# EAGLE board CT_schematic (EAGLE 7.6.0)

Size 100 x 80 mm. Coordinates in mm from the lower left corner, seen from the top.
Outline: 0,0 100,0 100,80 0,80 0,0
Copper layers (1*16): Top 0.035mm / dielectric 1.5mm / Bottom 0.035mm
Design rules "default": minimum track width 10mil, minimum drill 24mil, track to track 8mil, track to pad 8mil, pad to pad 8mil, via to via 8mil, smd to smd 8mil, copper to edge 40mil, drill to drill 8mil, minimum pad ring 10mil, minimum via ring 8mil, stop-mask expansion 4mil, vias tented up to drill 0mil, thermal gap 10mil

## Footprints (pad centres in the part's own frame; a part is rotated, then mirrored left to right if it is on the bottom)
C0402 = smd 0.5 x 0.5: 1 -0.508,0; 2 0.508,0
C0603 = smd 0.8 x 0.8: 1 -0.762,0; 2 0.762,0
C0805 = smd 1.2 x 1.3: 1 -1.016,0; 2 1.016,0
C1210 = smd 1.2 x 2.5: 1 -1.524,0; 2 1.524,0
EXV-9B = smd 2.718 x 1.778: 1 -2.108,0; 2 2.108,0
R0603 = smd 0.8 x 0.8: 1 -0.762,0; 2 0.762,0
EXV-9H = smd 3.505 x 1.676: 1 -2.857,0; 2 2.857,0
L0603 = smd 0.8 x 0.8: 1 -0.762,0; 2 0.762,0
PJ-037B_PACKAGE = drill 3.7 square: 1 12,0 | drill 3.2 square: 2 6,0
UFBGA176 = smd 0.3 x 0.3: A1 0,0; A2 0.65,0; A3 1.3,0; A4 1.95,0; A5 2.6,0; A6 3.25,0; A7 3.9,0; A8 4.55,0; A9 5.2,0; A10 5.85,0; A11 6.5,0; A12 7.15,0; A13 7.8,0; A14 8.45,0; A15 9.1,0; B1 0,-0.65; B2 0.65,-0.65; B3 1.3,-0.65; B4 1.95,-0.65; B5 2.6,-0.65; B6 3.25,-0.65; B7 3.9,-0.65; B8 4.55,-0.65; B9 5.2,-0.65; B10 5.85,-0.65; B11 6.5,-0.65; B12 7.15,-0.65; B13 7.8,-0.65; B14 8.45,-0.65; B15 9.1,-0.65; C1 0,-1.3; C2 0.65,-1.3; C3 1.3,-1.3; C4 1.95,-1.3; C5 2.6,-1.3; C6 3.25,-1.3; C7 3.9,-1.3; C8 4.55,-1.3; C9 5.2,-1.3; C10 5.85,-1.3; C11 6.5,-1.3; C12 7.15,-1.3; C13 7.8,-1.3; C14 8.45,-1.3; C15 9.1,-1.3; D1 0,-1.95; D2 0.65,-1.95; D3 1.3,-1.95; D4 1.95,-1.95; D5 2.6,-1.95; D6 3.25,-1.95; D7 3.9,-1.95; D8 4.55,-1.95; D9 5.2,-1.95; D10 5.85,-1.95; D11 6.5,-1.95; D12 7.15,-1.95; D13 7.8,-1.95; D14 8.45,-1.95; D15 9.1,-1.95; E1 0,-2.6; E2 0.65,-2.6; E3 1.3,-2.6; E4 1.95,-2.6; E12 7.15,-2.6; E13 7.8,-2.6; E14 8.45,-2.6; E15 9.1,-2.6; F1 0,-3.25; F2 0.65,-3.25; F3 1.3,-3.25; F4 1.95,-3.25; F6 3.25,-3.25; F7 3.9,-3.25; F8 4.55,-3.25; F9 5.2,-3.25; F10 5.85,-3.25; F12 7.15,-3.25; F13 7.8,-3.25; F14 8.45,-3.25; F15 9.1,-3.25; G1 0,-3.9; G2 0.65,-3.9; G3 1.3,-3.9; G4 1.95,-3.9; G6 3.25,-3.9; G7 3.9,-3.9; G8 4.55,-3.9; G9 5.2,-3.9; G10 5.85,-3.9; G12 7.15,-3.9; G13 7.8,-3.9; G14 8.45,-3.9; G15 9.1,-3.9; H1 0,-4.55; H2 0.65,-4.55; H3 1.3,-4.55; H4 1.95,-4.55; H6 3.25,-4.55; H7 3.9,-4.55; H8 4.55,-4.55; H9 5.2,-4.55; H10 5.85,-4.55; H12 7.15,-4.55; H13 7.8,-4.55; H14 8.45,-4.55; H15 9.1,-4.55; J1 0,-5.2; J2 0.65,-5.2; J3 1.3,-5.2; J4 1.95,-5.2; J6 3.25,-5.2; J7 3.9,-5.2; J8 4.55,-5.2; J9 5.2,-5.2; J10 5.85,-5.2; J12 7.15,-5.2; J13 7.8,-5.2; J14 8.45,-5.2; J15 9.1,-5.2; K1 0,-5.85; K2 0.65,-5.85; K3 1.3,-5.85; K4 1.95,-5.85; K6 3.25,-5.85; K7 3.9,-5.85; K8 4.55,-5.85; K9 5.2,-5.85; K10 5.85,-5.85; K12 7.15,-5.85; K13 7.8,-5.85; K14 8.45,-5.85; K15 9.1,-5.85; L1 0,-6.5; L2 0.65,-6.5; L3 1.3,-6.5; L4 1.95,-6.5; L12 7.15,-6.5; L13 7.8,-6.5; L14 8.45,-6.5; L15 9.1,-6.5; M1 0,-7.15; M2 0.65,-7.15; M3 1.3,-7.15; M4 1.95,-7.15; M5 2.6,-7.15; M6 3.25,-7.15; M7 3.9,-7.15; M8 4.55,-7.15; M9 5.2,-7.15; M10 5.85,-7.15; M11 6.5,-7.15; M12 7.15,-7.15; M13 7.8,-7.15; M14 8.45,-7.15; M15 9.1,-7.15; N1 0,-7.8; N2 0.65,-7.8; N3 1.3,-7.8; N4 1.95,-7.8; N5 2.6,-7.8; N6 3.25,-7.8; N7 3.9,-7.8; N8 4.55,-7.8; N9 5.2,-7.8; N10 5.85,-7.8; N11 6.5,-7.8; N12 7.15,-7.8; N13 7.8,-7.8; N14 8.45,-7.8; N15 9.1,-7.8; P1 0,-8.45; P2 0.65,-8.45; P3 1.3,-8.45; P4 1.95,-8.45; P5 2.6,-8.45; P6 3.25,-8.45; P7 3.9,-8.45; P8 4.55,-8.45; P9 5.2,-8.45; P10 5.85,-8.45; P11 6.5,-8.45; P12 7.15,-8.45; P13 7.8,-8.45; P14 8.45,-8.45; P15 9.1,-8.45; R1 0,-9.1; R2 0.65,-9.1; R3 1.3,-9.1; R4 1.95,-9.1; R5 2.6,-9.1; R6 3.25,-9.1; R7 3.9,-9.1; R8 4.55,-9.1; R9 5.2,-9.1; R10 5.85,-9.1; R11 6.5,-9.1; R12 7.15,-9.1; R13 7.8,-9.1; R14 8.45,-9.1; R15 9.1,-9.1
QFN-32 = smd 0.6 x 0.3: 1 -2.3,1.75; 2 -2.3,1.25; 3 -2.3,0.75; 4 -2.3,0.25; 5 -2.3,-0.25; 6 -2.3,-0.75; 7 -2.3,-1.25; 8 -2.3,-1.75; 17 2.3,-1.75; 18 2.3,-1.25; 19 2.3,-0.75; 20 2.3,-0.25; 21 2.3,0.25; 22 2.3,0.75; 23 2.3,1.25; 24 2.3,1.75 | smd 0.3 x 0.6: 9 -1.75,-2.3; 10 -1.25,-2.3; 11 -0.75,-2.3; 12 -0.25,-2.3; 13 0.25,-2.3; 14 0.75,-2.3; 15 1.25,-2.3; 16 1.75,-2.3; 25 1.75,2.3; 26 1.25,2.3; 27 0.75,2.3; 28 0.25,2.3; 29 -0.25,2.3; 30 -0.75,2.3; 31 -1.25,2.3; 32 -1.75,2.3 | smd 3.2 x 3.2: EXP 0,0
7498011122R = smd 0.71 x 2.29: 1 -3.545,-3.18; 2 -2.525,-3.18; 3 -1.505,-3.18; 4 -0.485,-3.18; 5 0.535,-3.18; 6 1.555,-3.18; 8 3.595,-3.18; 9 5.635,-3.18; 10 6.655,-3.18; 11 -6.605,-3.18; 12 -5.585,-3.18 | smd 1.4 x 2.54: 13 -8.51,10.2; 14 8.51,10.2 | hole 1.4: -3.5,0; 3.5,0
VFBGA-63 = smd 0.4 x 0.4: A1 -3.6,4.4; A2 -2.8,4.4; A9 2.8,4.4; A10 3.6,4.4; B1 -3.6,3.6; B9 2.8,3.6; B10 3.6,3.6; C3 -2,2.8; C4 -1.2,2.8; C5 -0.4,2.8; C6 0.4,2.8; C7 1.2,2.8; C8 2,2.8; D3 -2,2; D4 -1.2,2; D5 -0.4,2; D6 0.4,2; D7 1.2,2; D8 2,2; E3 -2,1.2; E4 -1.2,1.2; E5 -0.4,1.2; E6 0.4,1.2; E7 1.2,1.2; E8 2,1.2; F3 -2,0.4; F4 -1.2,0.4; F5 -0.4,0.4; F6 0.4,0.4; F7 1.2,0.4; F8 2,0.4; G3 -2,-0.4; G4 -1.2,-0.4; G5 -0.4,-0.4; G6 0.4,-0.4; G7 1.2,-0.4; G8 2,-0.4; H3 -2,-1.2; H4 -1.2,-1.2; H5 -0.4,-1.2; H6 0.4,-1.2; H7 1.2,-1.2; H8 2,-1.2; J3 -2,-2; J4 -1.2,-2; J5 -0.4,-2; J6 0.4,-2; J7 1.2,-2; J8 2,-2; K3 -2,-2.8; K4 -1.2,-2.8; K5 -0.4,-2.8; K6 0.4,-2.8; K7 1.2,-2.8; K8 2,-2.8; L1 -3.6,-3.6; L2 -2.8,-3.6; L9 2.8,-3.6; L10 3.6,-3.6; M1 -3.6,-4.4; M2 -2.8,-4.4; M9 2.8,-4.4; M10 3.6,-4.4
RHB32_3P45X3P45 = smd 0.85 x 0.28: 1 -2.475,1.75; 2 -2.475,1.25; 3 -2.475,0.75; 4 -2.475,0.25; 5 -2.475,-0.25; 6 -2.475,-0.75; 7 -2.475,-1.25; 8 -2.475,-1.75; 17 2.475,-1.75; 18 2.475,-1.25; 19 2.475,-0.75; 20 2.475,-0.25; 21 2.475,0.25; 22 2.475,0.75; 23 2.475,1.25; 24 2.475,1.75 | smd 0.28 x 0.85: 9 -1.75,-2.475; 10 -1.25,-2.475; 11 -0.75,-2.475; 12 -0.25,-2.475; 13 0.25,-2.475; 14 0.75,-2.475; 15 1.25,-2.475; 16 1.75,-2.475; 25 1.75,2.475; 26 1.25,2.475; 27 0.75,2.475; 28 0.25,2.475; 29 -0.25,2.475; 30 -0.75,2.475; 31 -1.25,2.475; 32 -1.75,2.475 | smd 3.45 x 3.45: 33 0,0
MICRO_USB_AB = smd 0.4 x 1.35: 1 1.3,0.26; 2 0.65,0.26; 3 0,0.26; 4 -0.65,0.26; 5 -1.3,0.26 | drill 0.6 pad 0.95 long: 6 4.175,-2.54; 7 -4.175,-2.54 | drill 0.7 pad 1.1 long: 8 -2.225,0.46; 9 2.225,0.46
SOT143B = smd 1 x 0.7: 1 -0.75,-1 | smd 0.6 x 0.7: 2 0.95,-1; 3 0.95,1; 4 -0.95,1
SOT-23-6 = smd 1.1 x 0.6: 1 -1.4,0.95; 2 -1.4,0; 3 -1.4,-0.95; 4 1.4,-0.95; 5 1.4,0; 6 1.4,0.95
ABLS-25.000MHZ-B2F-T = smd 5.6 x 2.8: 1 -3.81,0; 2 5.69,0
ASEK = smd 1.4 x 1: 1 -1.1,-0.8; 2 1.1,-0.8; 3 1.1,0.8; 4 -1.1,0.8
ASFL1 = smd 1.7 x 1.5: 1 -1.27,-1.1; 2 1.27,-1.1; 3 1.27,1.1; 4 -1.27,1.1
WSON-8 = smd 0.3 x 0.6: 1 -0.75,0; 2 0.05,0; 3 0.85,0; 4 1.65,0; 5 1.65,3.8; 6 0.85,3.8; 7 0.05,3.8; 8 -0.75,3.8 | smd 3 x 2.6: PAD 0.45,1.9
LP2954 = smd 1.6 x 0.6: 1 -2.475,1.905 | smd 1.55 x 0.6: 2 -2.475,0.635; 3 -2.475,-0.635; 4 -2.475,-1.905; 5 2.475,-1.905; 6 2.475,-0.635; 7 2.475,0.635; 8 2.475,1.905
QFN-38_UHF = smd 0.75 x 0.3: 1 -2.4,2.75; 2 -2.4,2.25; 3 -2.4,1.75; 4 -2.4,1.25; 6 -2.4,0.25; 7 -2.4,-0.25; 8 -2.4,-0.75; 9 -2.4,-1.25; 10 -2.4,-1.75; 11 -2.4,-2.25; 12 -2.4,-2.75; 20 2.4,-2.75; 21 2.4,-2.25; 22 2.4,-1.75; 23 2.4,-1.25; 24 2.4,-0.75; 25 2.4,-0.25; 26 2.4,0.25; 27 2.4,0.75; 28 2.4,1.25; 29 2.4,1.75; 30 2.4,2.25; 31 2.4,2.75 | smd 0.758 x 0.3: 5 -2.4,0.75 | smd 0.3 x 0.75: 13 -1.5,-3.4; 14 -1,-3.4; 15 -0.5,-3.4; 16 0,-3.4; 17 0.5,-3.4; 18 1,-3.4; 19 1.5,-3.4; 32 1.5,3.4; 33 1,3.4; 34 0.5,3.4; 35 0,3.4; 36 -0.5,3.4; 37 -1,3.4; 38 -1.5,3.4 | smd 3.2 x 5.2: 39 0,0
IRF8306MTRPBF = smd 0.9 x 1.85: 1 0,0; 2 0,-2.35; 6 6.4,0; 7 6.4,-2.35 | smd 0.75 x 0.75: 3 1.75,-1.175 | smd 1.45 x 0.87: 4 3.5,-0.565; 5 3.5,-1.785
SW_4-1437565-2 = smd 1.4 x 2.1: 1 -2.23,4.55; 2 -2.23,-4.55; 3 2.23,4.55; 4 2.23,-4.55
LGM67K-G1J2-24-Z = smd 0.8 x 1.4: A -2,0; C 0,0
NC7SZ125M5X = smd 1.3 x 0.7: 1 -1.3,0.95; 2 -1.3,0; 3 -1.3,-0.95; 4 1.3,-0.95; 5 1.3,0.95

## Placement (x,y rotation side)
C1  1e-07  [C0402]  -39.37,96.52 0 top  (outside the outline)
C2  1e-06  [C0603]  -63.5,86.36 0 top  (outside the outline)
C3  1e-07  [C0402]  -43.18,96.52 0 top  (outside the outline)
C4  1e-07  [C0402]  -46.99,96.52 0 top  (outside the outline)
C5  1e-07  [C0402]  -50.8,96.52 0 top  (outside the outline)
C6  1e-07  [C0402]  -54.61,96.52 0 top  (outside the outline)
C7  1e-07  [C0402]  -58.42,96.52 0 top  (outside the outline)
C8  1e-07  [C0402]  -62.23,96.52 0 top  (outside the outline)
C9  1e-07  [C0402]  -66.04,96.52 0 top  (outside the outline)
C10  1e-07  [C0402]  -69.85,96.52 0 top  (outside the outline)
C11  1e-07  [C0402]  -73.66,96.52 0 top  (outside the outline)
C12  1e-07  [C0402]  -77.47,96.52 0 top  (outside the outline)
C13  1e-07  [C0402]  -81.28,96.52 0 top  (outside the outline)
C14  1e-07  [C0402]  -85.09,96.52 0 top  (outside the outline)
C15  1e-07  [C0402]  -88.9,96.52 0 top  (outside the outline)
C16  1e-07  [C0402]  -92.71,96.52 0 top  (outside the outline)
C17  1e-07  [C0402]  -15.24,101.6 0 top  (outside the outline)
C18  1e-07  [C0402]  -19.05,101.6 0 top  (outside the outline)
C19  1e-07  [C0402]  -22.86,101.6 0 top  (outside the outline)
C20  4.7e-06  [C0805]  -82.55,69.85 0 top  (outside the outline)
C21  1e-07  [C0402]  -26.67,101.6 0 top  (outside the outline)
C22  1e-07  [C0402]  -30.48,101.6 0 top  (outside the outline)
C23  1e-08  [C0603]  -67.31,86.36 0 top  (outside the outline)
C24  1e-06  [C0603]  -71.12,86.36 0 top  (outside the outline)
C25  1e-11  [C0402]  -34.29,101.6 0 top  (outside the outline)
C26  1e-11  [C0402]  -38.1,101.6 0 top  (outside the outline)
C27  1e-07  [C0402]  -41.91,101.6 0 top  (outside the outline)
C28  1e-07  [C0402]  -45.72,101.6 0 top  (outside the outline)
C29  1e-07  [C0402]  -49.53,101.6 0 top  (outside the outline)
C30  1e-07  [C0402]  -53.34,101.6 0 top  (outside the outline)
C31  2.2e-06  [C0603]  -44.45,86.36 0 top  (outside the outline)
C32  1e-07  [C0402]  -57.15,101.6 0 top  (outside the outline)
C33  1e-07  [C0402]  -60.96,101.6 0 top  (outside the outline)
C34  1e-05  [C0805]  -87.63,69.85 0 top  (outside the outline)
C35  1e-07  [C0402]  -64.77,101.6 0 top  (outside the outline)
C36  2.2e-11  [C0402]  -31.75,96.52 0 top  (outside the outline)
C37  2.2e-11  [C0402]  -35.56,96.52 0 top  (outside the outline)
C38  1e-07  [C0402]  -68.58,101.6 0 top  (outside the outline)
C39  1e-07  [C0402]  -72.39,101.6 0 top  (outside the outline)
C40  1e-07  [C0402]  -76.2,101.6 0 top  (outside the outline)
C41  1e-07  [C0402]  -80.01,101.6 0 top  (outside the outline)
C42  2.2e-06  [C0603]  -48.26,86.36 0 top  (outside the outline)
C43  1e-07  [C0402]  -83.82,101.6 0 top  (outside the outline)
C44  2.2e-06  [C0603]  -52.07,86.36 0 top  (outside the outline)
C45  1e-07  [C0402]  -87.63,101.6 0 top  (outside the outline)
C46  1e-07  [C0402]  -91.44,101.6 0 top  (outside the outline)
C47  2.2e-06  [C0603]  -55.88,86.36 0 top  (outside the outline)
C48  1e-06  [C0603]  -74.93,86.36 0 top  (outside the outline)
C49  1e-08  [C0402]  -15.24,106.68 0 top  (outside the outline)
C50  1e-08  [C0402]  -19.05,106.68 0 top  (outside the outline)
C51  1e-08  [C0402]  -22.86,106.68 0 top  (outside the outline)
C52  1e-05  [C1210]  -78.74,62.23 0 top  (outside the outline)
C53  1e-05  [C0805]  -92.71,69.85 0 top  (outside the outline)
C54  1e-06  [EXV-9B]  -24.13,69.85 0 top  (outside the outline)
C55  2.2e-06  [EXV-9B]  -33.02,69.85 0 top  (outside the outline)
C56  1e-06  [EXV-9B]  -41.91,69.85 0 top  (outside the outline)
C57  2.2e-06  [EXV-9B]  -50.8,69.85 0 top  (outside the outline)
C58  1e-08  [C0402]  -26.67,106.68 0 top  (outside the outline)
C59  1e-05  [C1210]  -85.09,62.23 0 top  (outside the outline)
C60  1e-05  [C1210]  -91.44,62.23 0 top  (outside the outline)
C61  1e-08  [C0402]  -30.48,106.68 0 top  (outside the outline)
C62  1e-05  [C1210]  -16.51,69.85 0 top  (outside the outline)
C63  1e-05  [C0805]  -15.24,76.2 0 top  (outside the outline)
C64  1e-07  [C0402]  -34.29,106.68 0 top  (outside the outline)
C65  2.2e-06  [C0603]  -59.69,86.36 0 top  (outside the outline)
C66  2.45e-08  [R0603]  -15.24,81.28 0 top  (outside the outline)
C67  2.8258362168397e-09  [R0603]  -25.4,76.2 0 top  (outside the outline)
C68  7.105e-09  [R0603]  -43.18,76.2 0 top  (outside the outline)
C69  0.0001  [EXV-9H]  -66.04,53.34 0 top  (outside the outline)
C70  0.0001  [EXV-9H]  -77.47,53.34 0 top  (outside the outline)
C71  1e-08  [C0402]  -38.1,106.68 0 top  (outside the outline)
C72  1e-08  [C0402]  -41.91,106.68 0 top  (outside the outline)
C73  1e-08  [C0402]  -45.72,106.68 0 top  (outside the outline)
F1  600.0  [L0603]  -78.74,86.36 0 top  (outside the outline)
I1  97.0  [R0603]  -82.55,86.36 0 top  (outside the outline)
J1  PJ-037B  [PJ-037B_PACKAGE]  -46.99,7.62 0 top  (outside the outline)
R2  1000.0  [R0603]  -86.36,86.36 0 top  (outside the outline)
R7  4700.0  [R0603]  -90.17,86.36 0 top  (outside the outline)
R8  4700.0  [R0603]  -15.24,91.44 0 top  (outside the outline)
R9  4700.0  [R0603]  -19.05,91.44 0 top  (outside the outline)
R10  2200.0  [R0603]  -22.86,91.44 0 top  (outside the outline)
R12  2200.0  [R0603]  -26.67,91.44 0 top  (outside the outline)
R14  10000.0  [R0603]  -20.32,81.28 0 top  (outside the outline)
R15  10000.0  [R0603]  -25.4,81.28 0 top  (outside the outline)
R16  10000.0  [R0603]  -30.48,81.28 0 top  (outside the outline)
R17  0.1  [R0603]  -30.48,91.44 0 top  (outside the outline)
R18  0.1  [R0603]  -34.29,91.44 0 top  (outside the outline)
R19  200.0  [R0603]  -38.1,91.44 0 top  (outside the outline)
R20  220.0  [R0603]  -41.91,91.44 0 top  (outside the outline)
R21  6490.0  [R0603]  -45.72,91.44 0 top  (outside the outline)
R22  4700.0  [R0603]  -49.53,91.44 0 top  (outside the outline)
R23  4700.0  [R0603]  -53.34,91.44 0 top  (outside the outline)
R24  1000.0  [R0603]  -57.15,91.44 0 top  (outside the outline)
R25  1000.0  [R0603]  -60.96,91.44 0 top  (outside the outline)
R26  1000.0  [R0603]  -64.77,91.44 0 top  (outside the outline)
R27  4700.0  [R0603]  -68.58,91.44 0 top  (outside the outline)
R28  1000.0  [R0603]  -72.39,91.44 0 top  (outside the outline)
R29  1000.0  [R0603]  -76.2,91.44 0 top  (outside the outline)
R30  1000.0  [R0603]  -80.01,91.44 0 top  (outside the outline)
R31  4700.0  [R0603]  -83.82,91.44 0 top  (outside the outline)
R32  10000.0  [R0603]  -35.56,81.28 0 top  (outside the outline)
R33  10000.0  [R0603]  -40.64,81.28 0 top  (outside the outline)
R34  10000.0  [R0603]  -45.72,81.28 0 top  (outside the outline)
R35  10000.0  [R0603]  -50.8,81.28 0 top  (outside the outline)
R36  10000.0  [R0603]  -55.88,81.28 0 top  (outside the outline)
R37  47000.0  [R0603]  -60.96,81.28 0 top  (outside the outline)
R38  10000.0  [R0603]  -66.04,81.28 0 top  (outside the outline)
R39  10000.0  [R0603]  -71.12,81.28 0 top  (outside the outline)
R40  100000.0  [R0603]  -48.26,76.2 0 top  (outside the outline)
R41  200.0  [R0603]  -87.63,91.44 0 top  (outside the outline)
R42  1000.0  [R0603]  -91.44,91.44 0 top  (outside the outline)
R43  100000.0  [R0603]  -53.34,76.2 0 top  (outside the outline)
R44  100000.0  [R0603]  -58.42,76.2 0 top  (outside the outline)
R45  47000.0  [R0603]  -76.2,81.28 0 top  (outside the outline)
R46  100000.0  [R0603]  -63.5,76.2 0 top  (outside the outline)
R47  100000.0  [R0603]  -68.58,76.2 0 top  (outside the outline)
R48  100000.0  [R0603]  -73.66,76.2 0 top  (outside the outline)
R49  164658.62  [R0603]  -38.1,76.2 0 top  (outside the outline)
R50  100000.0  [R0603]  -78.74,76.2 0 top  (outside the outline)
R51  100000.0  [R0603]  -83.82,76.2 0 top  (outside the outline)
R52  3900.0  [R0603]  -15.24,96.52 0 top  (outside the outline)
R53  1000.0  [R0603]  -19.05,96.52 0 top  (outside the outline)
R54  100000.0  [R0603]  -88.9,76.2 0 top  (outside the outline)
R55  200.0  [R0603]  -22.86,96.52 0 top  (outside the outline)
R56  1000.0  [R0603]  -26.67,96.52 0 top  (outside the outline)
R57  10000.0  [R0603]  -81.28,81.28 0 top  (outside the outline)
R58  75000.0  [R0603]  -86.36,81.28 0 top  (outside the outline)
R59  10000.0  [R0603]  -91.44,81.28 0 top  (outside the outline)
R60  10000.0  [R0603]  -15.24,86.36 0 top  (outside the outline)
R61  95300.0  [R0603]  -20.32,86.36 0 top  (outside the outline)
R62  95300.0  [R0603]  -25.4,86.36 0 top  (outside the outline)
R63  10000.0  [R0603]  -30.48,86.36 0 top  (outside the outline)
R64  10000.0  [R0603]  -35.56,86.36 0 top  (outside the outline)
R65  10000.0  [R0603]  -40.64,86.36 0 top  (outside the outline)
R66  130963.63636364  [R0603]  -33.02,76.2 0 top  (outside the outline)
U1  STM32F407IGH6  [UFBGA176]  -22.86,38.1 0 top  (outside the outline)
U2  KSZ8081RNBIA-TR  [QFN-32]  -36.83,34.29 0 top  (outside the outline)
U3  7498011122R  [7498011122R]  -22.86,7.62 0 top  (outside the outline)
U4  mt29f4g08abbdah4  [VFBGA-63]  -53.34,6.35 0 top  (outside the outline)
U5  TUSB1210BRHBR  [RHB32_3P45X3P45]  -58.42,63.5 0 top  (outside the outline)
U6  47590-0001  [MICRO_USB_AB]  -66.04,7.62 0 top  (outside the outline)
U7  prtr5v0u2ax  [SOT143B]  -58.42,106.68 0 top  (outside the outline)
U8  MAX4995AAUT+T  [SOT-23-6]  -58.42,68.58 0 top  (outside the outline)
U9  ABLS-25.000MHZ-B2F-T  [ABLS-25.000MHZ-B2F-T]  -26.67,63.5 0 top  (outside the outline)
U10  ABLS-25.000MHZ-B2F-T  [ABLS-25.000MHZ-B2F-T]  -46.99,63.5 0 top  (outside the outline)
U11  ASEK-32.768KHz-ECST  [ASEK]  -57.15,53.34 0 top  (outside the outline)
U12  ASFL1-19.2MHZ-NCS  [ASFL1]  -27.94,54.61 0 top  (outside the outline)
U13  LP3878SDX-ADJ/NOPB  [WSON-8]  -45.72,43.18 0 top  (outside the outline)
U14  LP2954AIMX/NOPB  [LP2954]  -54.61,33.02 0 top  (outside the outline)
U15  LP2954AIMX/NOPB  [LP2954]  -71.12,33.02 0 top  (outside the outline)
U16  LP3878SDX-ADJ/NOPB  [WSON-8]  -66.04,43.18 0 top  (outside the outline)
U17  LP3878SDX-ADJ/NOPB  [WSON-8]  -86.36,43.18 0 top  (outside the outline)
U18  LTC2928CUHF#PBF  [QFN-38_UHF]  -35.56,53.34 0 top  (outside the outline)
U19  IRF8306MTRPbF  [IRF8306MTRPBF]  -88.9,34.29 0 top  (outside the outline)
U20  IRF8306MTRPbF  [IRF8306MTRPBF]  -26.67,45.72 0 top  (outside the outline)
U21  4-1437565-2  [SW_4-1437565-2]  -86.36,6.35 0 top  (outside the outline)
U22  Q65110A2395  [LGM67K-G1J2-24-Z]  -67.31,62.23 0 top  (outside the outline)
U23  nc7sz125m5x  [NC7SZ125M5X]  -63.5,69.85 0 top  (outside the outline)
U24  nc7sz125m5x  [NC7SZ125M5X]  -69.85,69.85 0 top  (outside the outline)
U25  nc7sz125m5x  [NC7SZ125M5X]  -76.2,69.85 0 top  (outside the outline)

## Library data of the parts
C1-C73 F1 I1 J1 R2 R7-R10 R12 R14-R66 U1-U25 = circuit_tree

## Nets
CLK_CRYSTAL_U1_G1: C25.1 U1.G1 U9.1
CLK_CRYSTAL_U1_H1: C26.1 U1.H1 U9.2
CLK_CRYSTAL_U2_8: C36.1 U2.8 U10.2
CLK_CRYSTAL_U2_9: C37.1 U2.9 U10.1
CLK_U1_E1: U1.E1 U11.3
CLK_U5_1: U5.1 U12.3
GND: C1.2 C2.2 C3.2 C4.2 C5.2 C6.2 C7.2 C8.2 C9.2 C10.2 C11.2 C12.2 C13.2 C14.2 C15.2 C16.2 C17.2 C18.2 C19.2 C20.2 C21.2 C22.2 C23.2 C24.2 C25.2 C26.2 C27.2 C28.2 C29.2 C30.2 C31.2 C32.2 C33.2 C34.2 C35.2 C36.2 C37.2 C38.2 C39.2 C40.2 C41.2 C42.2 C43.2 C44.2 C45.2 C46.2 C47.2 C48.2 C49.2 C50.2 C51.2 C52.2 C53.2 C54.2 C55.2 C56.2 C57.2 C58.2 C59.2 C60.2 C61.2 C62.2 C63.2 C64.2 C65.2 C66.2 C67.2 C68.2 C69.2 C70.2 C71.2 C72.2 C73.2 J1.2 R2.2 R15.2 R17.2 R18.2 R21.2 R23.2 R24.2 R25.2 R26.2 R28.2 R29.2 R30.2 R37.2 R39.2 R42.2 R46.2 R50.2 R53.2 R56.2 R58.2 R61.2 R62.2 R63.2 R64.2 R65.2 U1.D5 U1.D7 U1.D8 U1.D9 U1.F2 U1.F6 U1.F7 U1.F8 U1.F9 U1.F10 U1.F12 U1.G2 U1.G6 U1.G7 U1.G8 U1.G9 U1.G10 U1.G12 U1.H6 U1.H7 U1.H8 U1.H9 U1.H10 U1.H12 U1.J6 U1.J7 U1.J8 U1.J9 U1.J10 U1.K6 U1.K7 U1.K8 U1.K9 U1.K10 U1.M1 U1.M8 U1.M9 U1.N1 U2.1 U2.EXP U3.1 U3.10 U4.C5 U4.F7 U4.K3 U4.K8 U5.33 U6.5 U6.6 U6.7 U6.8 U6.9 U7.1 U8.2 U11.2 U12.2 U13.3 U13.PAD U14.4 U15.4 U16.3 U16.PAD U17.3 U17.PAD U18.8 U18.9 U18.10 U18.12 U18.13 U18.24 U18.25 U18.30 U18.32 U18.39 U22.C U23.1 U23.3 U24.1 U24.3 U25.1 U25.3
NET_U1_C2: U21.3 U21.4
NET_U1_C3: U22.A
NET_U1_C5: C1.1 C2.1 C3.1 C23.1 C24.1 U1.C1 U1.C5 U1.C6 U1.C7 U1.C8 U1.C9 U1.F3 U1.G3 U1.G13 U1.H13 U1.J12 U1.J13 U1.K4 U1.N8 U1.N9 U1.N10 U1.R1
NET_U1_D6: R14.1 U1.D6
NET_U1_F13: C28.1 U1.F13
NET_U1_J1: R8.1 U1.J1 U24.4
NET_U1_L4: R16.1 U1.L4
NET_U1_M3: R10.1 U1.M3 U2.12
NET_U1_M6: R15.1 U1.M6
NET_U1_P1: C21.1 C22.1 F1.1 U1.P1
NET_U1_P2: R12.1 U1.P2 U2.11
NET_U2_2: C31.1 C32.1 U2.2
NET_U2_3: C33.1 I1.1 U2.3
NET_U2_10: R21.1 U2.10
NET_U2_13: R24.1 U2.13
NET_U2_14: R25.1 U2.14
NET_U2_19: R23.1 U2.19
NET_U2_20: R29.1 U2.20
NET_U2_21: R22.1 U2.21
NET_U2_28: R27.1 U2.28
NET_U2_29: R28.1 U2.29
NET_U2_31: R30.1 U2.31
NET_U2_32: R7.1 U2.32 U23.4
NET_U3_1: U2.7 U3.1
NET_U3_2: C29.1 U3.2
NET_U3_3: U2.6 U3.3
NET_U3_4: U2.5 U3.4
NET_U3_5: C30.1 U3.5
NET_U3_6: U2.4 U3.6
NET_U3_8: R18.1 U3.8
NET_U3_9: R19.1 U3.9
NET_U3_12: R20.1 U3.12
NET_U3_13: R17.1 U3.13 U3.14
NET_U3_30: R19.2
NET_U3_31: R20.2
NET_U4_C3: R36.1 U4.C3
NET_U5_11: R38.1 U5.11
NET_U5_12: C47.1 U5.12
NET_U5_14: R39.1 U5.14
NET_U5_20: C44.1 U5.20
NET_U5_27: R9.1 U5.27 U25.4
NET_U6_1: C48.1 U5.22 U6.1 U7.4 U8.1
NET_U6_2: U5.19 U6.2 U7.3
NET_U6_3: U5.18 U6.3 U7.2
NET_U6_4: U5.23 U6.4
NET_U8_3: R37.1 U8.3
NET_U8_4: U5.17 U8.4
NET_U13_1: C51.1 U13.1
NET_U13_6: R41.2 R42.1 U13.6
NET_U13_8: R40.1 U13.8
NET_U14_3: R44.1 U14.3
NET_U14_5: R43.1 U14.5
NET_U14_7: R45.2 R46.1 U14.7
NET_U15_3: R48.1 U15.3
NET_U15_5: R47.1 U15.5
NET_U15_7: R49.2 R50.1 U15.7
NET_U16_1: C58.1 U16.1
NET_U16_6: R52.2 R53.1 U16.6
NET_U16_8: R51.1 U16.8
NET_U17_1: C61.1 U17.1
NET_U17_6: R55.2 R56.1 U17.6
NET_U17_8: R54.1 U17.8
NET_U18_3: R64.1 U18.3
NET_U18_6: R61.1 U18.6
NET_U18_7: R62.1 U18.7
NET_U18_16: R63.1 R66.1 U18.16
NET_U18_18: R60.1 U18.18
NET_U18_19: R59.1 U18.19 U18.20
NET_U18_21: R57.1 R58.1 U18.21 U23.2 U24.2 U25.2
NET_U18_22: C64.1 R57.2 R59.2 R60.2 U18.11 U18.22
NET_U18_26: C67.1 U18.26
NET_U18_27: C66.1 U18.27
NET_U18_28: C68.1 U18.28
NET_U18_38: R65.1 U18.38
NET_U19_3: U18.2 U19.3
NET_U20_3: U18.37 U20.3
NET_U21_1: R2.1 U21.1 U21.2
PROC_ETH_RMII_CRS_DV: U1.R3 U2.18
PROC_ETH_RMII_RX_D0: R31.1 U1.N5 U2.16
PROC_ETH_RMII_RX_D1: R26.1 U1.P5 U2.15
PROC_ETH_RMII_TX_EN: U1.B9 U2.23
PROC_ETH_RMII_TXD0: U1.A8 U2.24
PROC_ETH_RMII_TXD1: U1.A7 U2.25
PROC_FSMC_A16: U1.N14 U4.D5
PROC_FSMC_A17: U1.N13 U4.C4
PROC_FSMC_D0: U1.M14 U4.H4
PROC_FSMC_D1: U1.L14 U4.J4
PROC_FSMC_D2: U1.B12 U4.K4
PROC_FSMC_D3: U1.C12 U4.K5
PROC_FSMC_D4: U1.R8 U4.K6
PROC_FSMC_D5: U1.P8 U4.J7
PROC_FSMC_D6: U1.P9 U4.K7
PROC_FSMC_D7: U1.R9 U4.J8
PROC_FSMC_NCE2: R33.1 U1.A11 U4.C6
PROC_FSMC_NOE: R35.1 U1.D10 U4.D4
PROC_FSMC_NWAIT: R32.1 U1.B11 U4.C8
PROC_FSMC_NWE: R34.1 U1.C11 U4.C7
PROC_OTG_HS_ULPI_CK: U1.P4 U5.26
PROC_OTG_HS_ULPI_D0: U1.R2 U5.3
PROC_OTG_HS_ULPI_D1: U1.R5 U5.4
PROC_OTG_HS_ULPI_D2: U1.R4 U5.5
PROC_OTG_HS_ULPI_D3: U1.R12 U5.6
PROC_OTG_HS_ULPI_D4: U1.R13 U5.7
PROC_OTG_HS_ULPI_D5: U1.P12 U5.9
PROC_OTG_HS_ULPI_D6: U1.P13 U5.10
PROC_OTG_HS_ULPI_D7: U1.A6 U5.13
PROC_OTG_HS_ULPI_DIR: U1.E4 U5.31
PROC_OTG_HS_ULPI_NXT: U1.M5 U5.2
PROC_OTG_HS_ULPI_STP: U1.M2 U5.29
VCC_15V8: C65.1 C69.1 C70.1 J1.1 R66.2 U18.23 U19.1 U19.2 U19.6 U19.7 U20.1 U20.2 U20.6 U20.7
VCC_S1_15V8: C52.1 C54.1 C56.1 C59.1 R40.2 R44.2 R48.2 R51.2 U13.4 U14.8 U15.8 U16.4 U19.4 U19.5
VCC_S2_15V8: C62.1 R54.2 U17.4 U20.4 U20.5
VCC_TIER1_1V2: C27.1 C53.1 R41.1 U1.M10 U13.5
VCC_TIER1_1V8: C4.1 C5.1 C6.1 C7.1 C8.1 C9.1 C10.1 C11.1 C12.1 C13.1 C14.1 C15.1 C16.1 C17.1 C18.1 C19.1 C20.1 C34.1 C35.1 C38.1 C39.1 C40.1 C41.1 C42.1 C45.1 C46.1 C55.1 C71.1 C72.1 C73.1 F1.2 R7.2 R8.2 R9.2 R10.2 R12.2 R14.2 R16.2 R22.2 R27.2 R31.2 R32.2 R33.2 R34.2 R35.2 R36.2 R38.2 R43.2 R45.1 U1.F3 U1.G13 U2.17 U4.D3 U4.G4 U4.H8 U4.J6 U5.28 U5.30 U5.32 U14.1 U23.5 U24.5 U25.5
VCC_TIER1_3V3: C43.1 C49.1 C50.1 C57.1 I1.2 R47.2 R49.1 U5.21 U11.4 U12.4 U15.1
VCC_TIER1_5V0: C60.1 R52.1 U8.5 U16.5
VCC_TIER2_1V2: C63.1 R55.1 U17.5

## Tracks (layer width: path | path; a pad name or v marks a point on that pad's centre or on a via)
CLK_CRYSTAL_U1_G1  (2 unrouted)
CLK_CRYSTAL_U1_H1  (2 unrouted)
CLK_CRYSTAL_U2_8  (2 unrouted)
CLK_CRYSTAL_U2_9  (2 unrouted)
CLK_U1_E1  (1 unrouted)
CLK_U5_1  (1 unrouted)
GND  (179 unrouted)
NET_U1_C2  (1 unrouted)
NET_U1_C5  (21 unrouted)
NET_U1_D6  (1 unrouted)
NET_U1_F13  (1 unrouted)
NET_U1_J1  (2 unrouted)
NET_U1_L4  (1 unrouted)
NET_U1_M3  (2 unrouted)
NET_U1_M6  (1 unrouted)
NET_U1_P1  (3 unrouted)
NET_U1_P2  (2 unrouted)
NET_U2_2  (2 unrouted)
NET_U2_3  (2 unrouted)
NET_U2_10  (1 unrouted)
NET_U2_13  (1 unrouted)
NET_U2_14  (1 unrouted)
NET_U2_19  (1 unrouted)
NET_U2_20  (1 unrouted)
NET_U2_21  (1 unrouted)
NET_U2_28  (1 unrouted)
NET_U2_29  (1 unrouted)
NET_U2_31  (1 unrouted)
NET_U2_32  (2 unrouted)
NET_U3_1  (1 unrouted)
NET_U3_2  (1 unrouted)
NET_U3_3  (1 unrouted)
NET_U3_4  (1 unrouted)
NET_U3_5  (1 unrouted)
NET_U3_6  (1 unrouted)
NET_U3_8  (1 unrouted)
NET_U3_9  (1 unrouted)
NET_U3_12  (1 unrouted)
NET_U3_13  (2 unrouted)
NET_U4_C3  (1 unrouted)
NET_U5_11  (1 unrouted)
NET_U5_12  (1 unrouted)
NET_U5_14  (1 unrouted)
NET_U5_20  (1 unrouted)
NET_U5_27  (2 unrouted)
NET_U6_1  (4 unrouted)
NET_U6_2  (2 unrouted)
NET_U6_3  (2 unrouted)
NET_U6_4  (1 unrouted)
NET_U8_3  (1 unrouted)
NET_U8_4  (1 unrouted)
NET_U13_1  (1 unrouted)
NET_U13_6  (2 unrouted)
NET_U13_8  (1 unrouted)
NET_U14_3  (1 unrouted)
NET_U14_5  (1 unrouted)
NET_U14_7  (2 unrouted)
NET_U15_3  (1 unrouted)
NET_U15_5  (1 unrouted)
NET_U15_7  (2 unrouted)
NET_U16_1  (1 unrouted)
NET_U16_6  (2 unrouted)
NET_U16_8  (1 unrouted)
NET_U17_1  (1 unrouted)
NET_U17_6  (2 unrouted)
NET_U17_8  (1 unrouted)
NET_U18_3  (1 unrouted)
NET_U18_6  (1 unrouted)
NET_U18_7  (1 unrouted)
NET_U18_16  (2 unrouted)
NET_U18_18  (1 unrouted)
NET_U18_19  (2 unrouted)
NET_U18_21  (5 unrouted)
NET_U18_22  (5 unrouted)
NET_U18_26  (1 unrouted)
NET_U18_27  (1 unrouted)
NET_U18_28  (1 unrouted)
NET_U18_38  (1 unrouted)
NET_U19_3  (1 unrouted)
NET_U20_3  (1 unrouted)
NET_U21_1  (2 unrouted)
PROC_ETH_RMII_CRS_DV  (1 unrouted)
PROC_ETH_RMII_RX_D0  (2 unrouted)
PROC_ETH_RMII_RX_D1  (2 unrouted)
PROC_ETH_RMII_TX_EN  (1 unrouted)
PROC_ETH_RMII_TXD0  (1 unrouted)
PROC_ETH_RMII_TXD1  (1 unrouted)
PROC_FSMC_A16  (1 unrouted)
PROC_FSMC_A17  (1 unrouted)
PROC_FSMC_D0  (1 unrouted)
PROC_FSMC_D1  (1 unrouted)
PROC_FSMC_D2  (1 unrouted)
PROC_FSMC_D3  (1 unrouted)
PROC_FSMC_D4  (1 unrouted)
PROC_FSMC_D5  (1 unrouted)
PROC_FSMC_D6  (1 unrouted)
PROC_FSMC_D7  (1 unrouted)
PROC_FSMC_NCE2  (2 unrouted)
PROC_FSMC_NOE  (2 unrouted)
PROC_FSMC_NWAIT  (2 unrouted)
PROC_FSMC_NWE  (2 unrouted)
PROC_OTG_HS_ULPI_CK  (1 unrouted)
PROC_OTG_HS_ULPI_D0  (1 unrouted)
PROC_OTG_HS_ULPI_D1  (1 unrouted)
PROC_OTG_HS_ULPI_D2  (1 unrouted)
PROC_OTG_HS_ULPI_D3  (1 unrouted)
PROC_OTG_HS_ULPI_D4  (1 unrouted)
PROC_OTG_HS_ULPI_D5  (1 unrouted)
PROC_OTG_HS_ULPI_D6  (1 unrouted)
PROC_OTG_HS_ULPI_D7  (1 unrouted)
PROC_OTG_HS_ULPI_DIR  (1 unrouted)
PROC_OTG_HS_ULPI_NXT  (1 unrouted)
PROC_OTG_HS_ULPI_STP  (1 unrouted)
VCC_15V8  (13 unrouted)
VCC_S1_15V8  (13 unrouted)
VCC_S2_15V8  (4 unrouted)
VCC_TIER1_1V2  (4 unrouted)
VCC_TIER1_1V8  (62 unrouted)
VCC_TIER1_3V3  (10 unrouted)
VCC_TIER1_5V0  (3 unrouted)
VCC_TIER2_1V2  (2 unrouted)